# Altium PCB EMG_interface.PcbDoc
Units mil, origin at the board's own origin, x right, y up, seen from the top; angles counter-clockwise.
Board outline 2230 x 1760 mil, 2 copper layers (Top Layer, Bottom Layer); 25 components, 25 nets, 131 pads, 3 vias.
Unrouted connection lines stored in the file: 24.
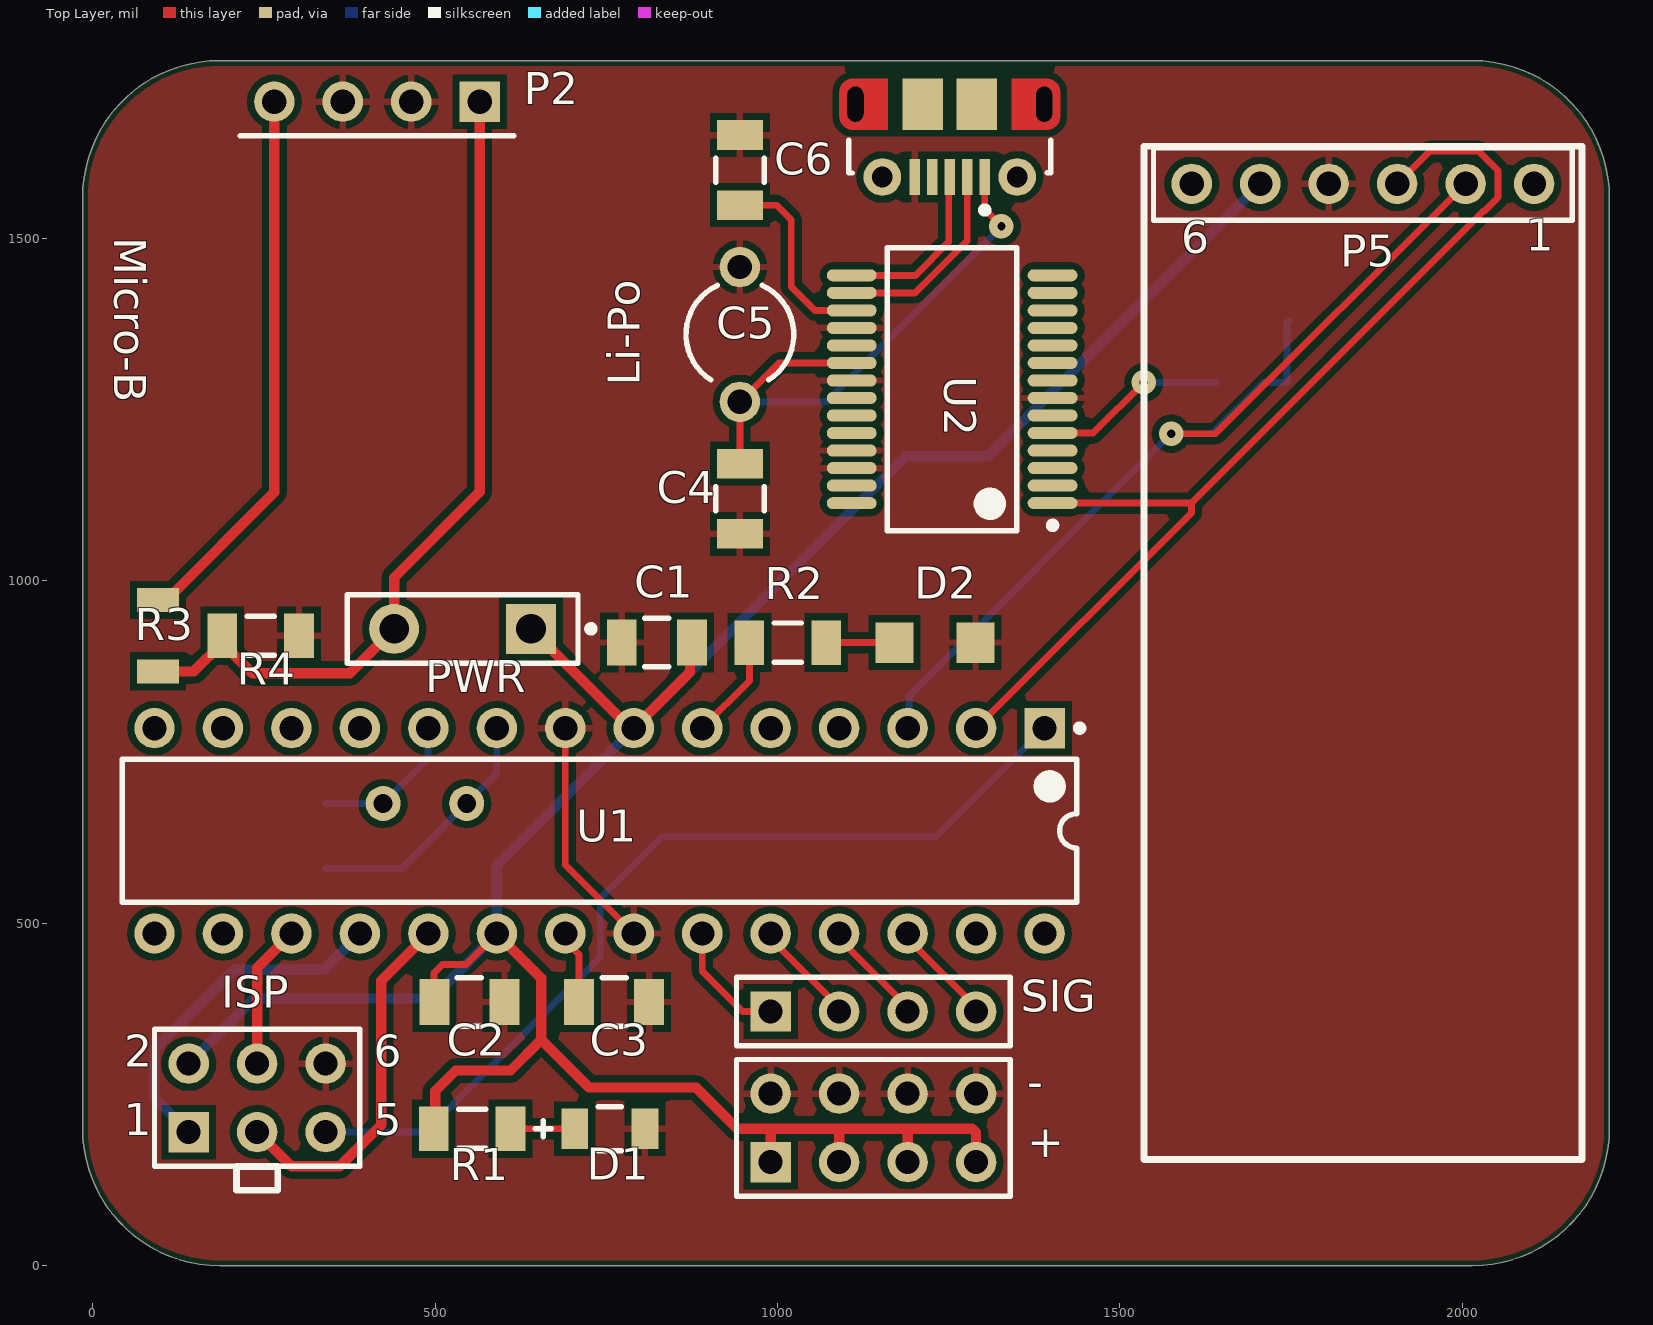
[diagram p0: Top Layer view]
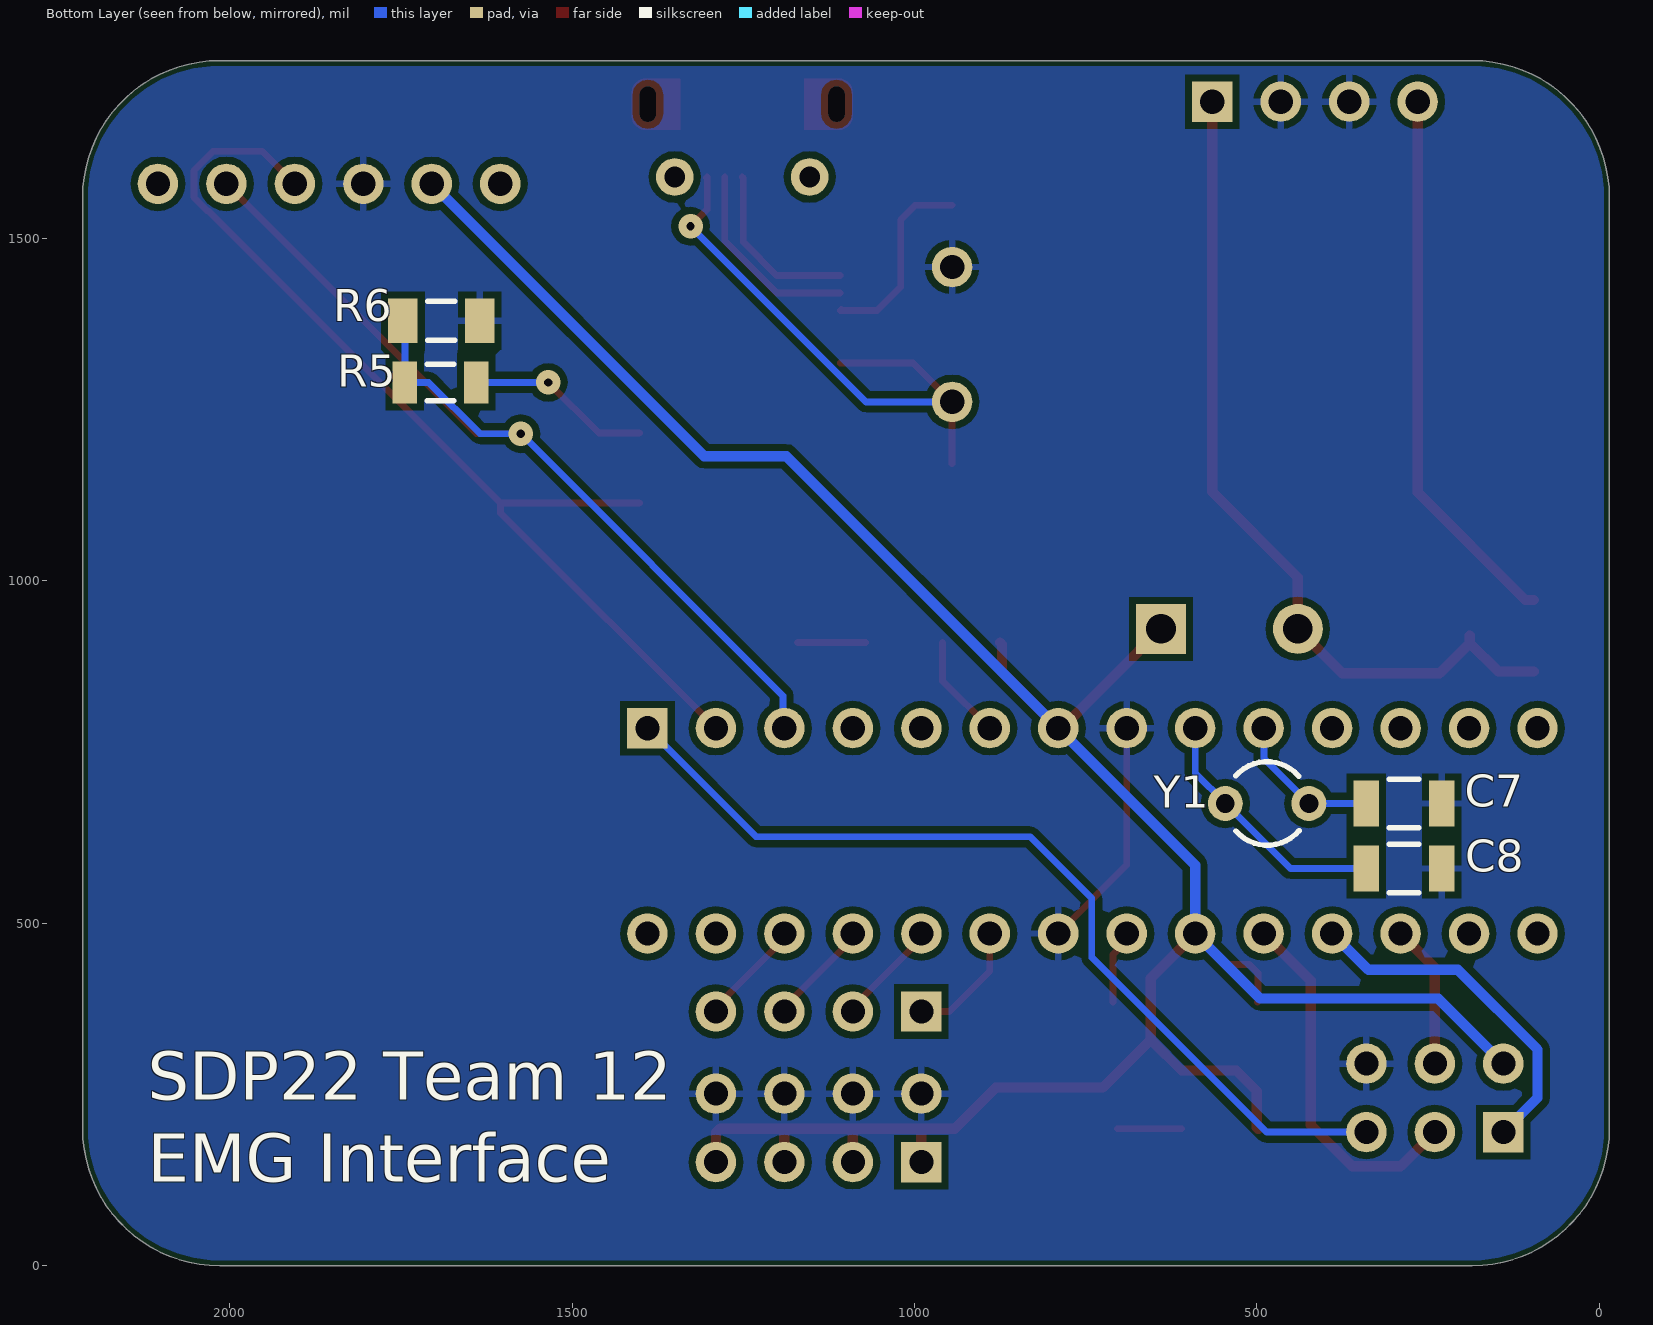
[diagram p1: Bottom Layer view, seen from below]

## Layer stack, top to bottom
Top Solder: solder mask 0.4, Solder Resist, Dk 3.5
Top Layer: signal copper 1.4
Dielectric 1: dielectric 12.6, FR-4, Dk 4.8
Bottom Layer: signal copper 1.4
Bottom Solder: solder mask 0.4, Solder Resist, Dk 3.5

## Board outline
-15,200 -15,1560 cw(c185,1560) 185,1760 2015,1760 cw(c2015,1560) 2215,1560 2215,200 cw(c2015,200) 2015,0 185,0 cw(c185,200)

## Design rules (kind name [scope] priority, off if disabled: settings)
BoardOutlineClearance [All] p1: gap=8 ignorepadtopadclearanceinfootprint=FALSE
Clearance [All] p1: gap=10 ignorepadtopadclearanceinfootprint=FALSE except(0: SMDPad-Hole THPad-Hole Via-Hole Fill-Hole Poly-Hole Region-Hole Text-Hole; 5: Arc-Arc Arc-Track Track-Track SMDPad-SMDPad; 12.99: Arc-THPad Track-THPad; 19.68: THPad-THPad)
HoleSize [All] p1: absolutevalues=TRUE maxlimit=248.03 minlimit=11.81 maxpercent=80.000 minpercent=20.000
HoleToHoleClearance [All] p1: gap=19.68 allowstackedmicrovias=TRUE
MinimumAnnularRing [All] p1: minimumring=11.81
MinimumSolderMaskSliver [All] p1: minsoldermaskwidth=7.87
PolygonConnect [All] p1: thpad.connectstyle=Relief thpad.reliefconductorwidth=10 thpad.reliefentries=4 thpad.polygonreliefangle="90 Angle" thpad.airgapwidth=10 smdpad.connectstyle=Relief smdpad.reliefconductorwidth=10 smdpad.reliefentries=4 smdpad.polygonreliefangle="90 Angle" smdpad.airgapwidth=10 via.connectstyle=Direct via.reliefconductorwidth=10 via.reliefentries=4 via.polygonreliefangle="90 Angle" via.airgapwidth=10
RoutingVias [All] p1: holewidth=12 width=25 viastyle="Through Hole" minholewidth=11.81 minwidth=23.62 maxholewidth=28 maxwidth=50
SilkToSolderMaskClearance [IsPad] p1: minsilkscreentomaskgap=5.91 clearancetoexposedcopper=TRUE
SolderMaskExpansion [All] p1: expansion=2 istentingtop=FALSE
UnRoutedNet [All] p1: checkbadconnections=TRUE
Width [All] p1: maxlimit=20 minlimit=5 preferedwidth=10 minimp=50.000000 maximp=50.000000 favimp=50.000000
25 further rules are at their usual default settings.

## Components (designator, comment, footprint, x,y, rotation, side; value= is the part's Value field where it differs from the comment)
C1 "0.1uF" FP-1206-L_3_2_0_2-W_1_6_0-IPC_C 823.79,910 r180 top
C2 "0.1uF" FP-1206-L_3_2_0_2-W_1_6_0-IPC_C 550,385 r0 top
C3 "0.1uF" FP-1206-L_3_2_0_2-W_1_6_0-IPC_C 761.21,385 r0 top
C4 "0.1uF" FP-1206-L_3_2_0_2-W_1_6_0-IPC_C 945,1120 r270 top
C5 "Cap2" CAPR5-4X5 945,1360 r90 top value=10uF
C6 "0.1uF" FP-1206-L_3_2_0_2-W_1_6_0-IPC_C 945,1600 r90 top
C7 "22pF" FP-C1206C-EB-MFG 285,675 r180 bottom value="22 pF"
C8 "22pF" FP-C1206C-EB-MFG 285,580 r180 bottom value="22 pF"
D1 "PWR" FP-SML-LX1206GC-TR-MFG 755,200 r0 top
ISP "ISP Header" HDR2X3 140,195 r0 top
J1 "105017-0001" USB-MICRO-B_V 1251.57,1643.15 r180 top
P2 "Header 4" HDR1X4#1 565,1700 r180 top
P4 "Header 4X2" HDR2X4 990,151.1 r0 top
P5 "61300611121" 61300611121 1855,1580 r180 top
PWR "Switch" SPST-2 540,930 r180 top
R1 "100" RESC3216X70X50NL05T20 553.9,200 r180 top
R2 "100" RESC3216X70X50NL05T20 1015,910 r0 top
R3 "1k" RESC3216X70X50LL05T20 95,920 r90 top
R4 "2k" RESC3216X70X50NL05T20 245,920 r180 top
R5 "1k" RESC3216X70X50LL05T20 1692.17,1290 r180 bottom
R6 "2k" RESC3216X70X50NL05T20 1691.1,1380 r0 bottom
SIG "Header 4" HDR1X4#2 990,371.1 r0 top
U1 "ATmega328-PU" 28P3 740,635 r270 top
U2 "FT232RL" FTDI-SSOP-28_M 1255,1280 r180 top
Y1 "XTAL" R38 485,675 r90 bottom

## Footprints (in the part's own frame and the unit in brackets; to place one, negate y for a bottom-side part, rotate by r counter-clockwise, add the part's x,y. Pads: shape width x height; smd on the part's side, far side on the other; paste and mask are expansions set on the pad)
28P3 [mm] "28-Pin Plastic Dual In-Line Package (PDIP)"
  rect 1.5x1.5 hole 0.9: 1(-3.81,16.51)
  round 1.5 hole 0.9: 2(-3.81,13.97) 3(-3.81,11.43) 4(-3.81,8.89) 5(-3.81,6.35) 6(-3.81,3.81) 7(-3.81,1.27) 8(-3.81,-1.27) 9(-3.81,-3.81) 10(-3.81,-6.35) 11(-3.81,-8.89) 12(-3.81,-11.43) 13(-3.81,-13.97) 14(-3.81,-16.51) 15(3.81,-16.51) 16(3.81,-13.97) 17(3.81,-11.43) 18(3.81,-8.89) 19(3.81,-6.35) 20(3.81,-3.81) 21(3.81,-1.27) 22(3.81,1.27) 23(3.81,3.81) 24(3.81,6.35) 25(3.81,8.89) 26(3.81,11.43) 27(3.81,13.97) 28(3.81,16.51)
  silkscreen extent -3.93,-17.7 2.65,17.94, body extent -3.6,-17.65 3.6,17.65, height 4.58
61300611121 [mm] "Pin Header, pitch 2.54 mm, THT, Vertical, single row, 6p"
  round 1.5 hole 0.9: 1(-6.35,0) 2(-3.81,0) 3(-1.27,0) 4(1.27,0) 5(3.81,0) 6(6.35,0)
  silkscreen extent -7.77,-1.35 7.77,1.35, body extent -7.62,-1.27 7.62,1.27, height 8.57
CAPR5-4X5 [mm] "Capacitor; 2 Leads"
  round 1.5 hole 0.9: 1(-2.5,0) 2(2.5,0)
  silkscreen extent -1.69,-2 1.82,2
FP-1206-L_3_2_0_2-W_1_6_0-IPC_C [mil]
  rect 43.49x67.17 smd paste+0 mask+0: 1(-51.21,0) 2(51.21,0)
  silkscreen extent -18,-35 18,35, body extent -77,-39 77,39, height 10
FP-C1206C-EB-MFG [mm]
  rect 0.95x1.7 smd paste+0 mask+0: 1(-1.4,0) 2(1.4,0)
  silkscreen extent -0.55,-0.9 0.55,0.9, body extent -1.6,-0.8 1.6,0.8, height 0.88
FP-SML-LX1206GC-TR-MFG [mm]
  rect 1x1.5 smd paste+0 mask+0: 1(-1.3,0) 2(1.3,0)
  silkscreen extent -2.78,-0.81 0.43,0.81, body extent -1.9,-0.91 1.9,0.91, height 0.25
FTDI-SSOP-28_M [mm] "SOP, 28-Leads, Body 10.5x5.6mm, Pitch 0.65mm, IPC Low Density"
  oval 1.85x0.45 smd: 1(-3.725,4.225) 5(-3.725,1.625) 15(3.725,-4.225) 17(3.725,-2.925) 20(3.725,-0.975)
  oval 1.85x0.45 smd mask-0.203: 2(-3.725,3.575) 4(-3.725,2.275) 6(-3.725,0.975) 16(3.725,-3.575) 18(3.725,-2.275) 19(3.725,-1.625) 21(3.725,-0.325)
  oval 1.85x0.45 smd mask+0: 3(-3.725,2.925) 7(-3.725,0.325) 8(-3.725,-0.325) 9(-3.725,-0.975) 10(-3.725,-1.625) 11(-3.725,-2.275) 12(-3.725,-2.925) 13(-3.725,-3.575) 14(-3.725,-4.225) 22(3.725,0.325) 23(3.725,0.975) 24(3.725,1.625) 25(3.725,2.275) 26(3.725,2.925) 27(3.725,3.575) 28(3.725,4.225)
  silkscreen extent -3.85,-5.25 2.4,5.25, body extent -3.9,-5.25 3.9,5.25, height 2
HDR1X4#1 [mm] "Connector; Header; 4 Position"
  rect 1.5x1.5 hole 0.9: 1(0,0)
  round 1.5 hole 0.9: 2(2.54,0) 3(5.08,0) 4(7.62,0)
  silkscreen extent -1.27,1.27 8.89,1.27
HDR1X4#2 [mm] "Connector; Header; 4 Position"
  rect 1.5x1.5 hole 0.889: 1(0,0)
  round 1.5 hole 0.889: 2(2.54,0) 3(5.08,0) 4(7.62,0)
  silkscreen extent -1.27,-1.27 8.89,1.27
HDR2X3 [mm] "Connector; Header; 3x2 Position"
  rect 1.5x1.5 hole 0.889: 1(0,0)
  round 1.5 hole 0.889: 2(0,2.54) 3(2.54,0) 4(2.54,2.54) 5(5.08,0) 6(5.08,2.54)
  silkscreen extent -1.27,-1.27 6.35,3.81
HDR2X4 [mm] "Connector; Header; 4x2 Position"
  rect 1.5x1.5 hole 0.889: 1(0,0)
  round 1.5 hole 0.889: 2(0,2.54) 3(2.54,0) 4(2.54,2.54) 5(5.08,0) 6(5.08,2.54) 7(7.62,0) 8(7.62,2.54)
  silkscreen extent -1.27,-1.27 8.89,3.81
R38 [mm] "Crystal, Thru-Hole; 2 Leads; Body 3.1 x 8.2 mm (Dia.xH)"
  round 1.3 hole 0.7: 1(0,1.55) 2(0,-1.55)
  silkscreen extent -1.55,-1.19 1.55,1.17
RESC3216X70X50LL05T20 [mm] "Chip Resistor, 2-Leads, Body 3.20x1.60mm, IPC High Density"
  rect 0.9x1.55 smd: 1(-1.325,0) 2(1.325,0)
  body extent -1.63,-0.82 1.62,0.82, height 0.7
RESC3216X70X50NL05T20 [mm] "Chip Resistor, 2-Leads, Body 3.20x1.60mm, IPC Medium Density"
  rect 1.1x1.65 smd: 1(-1.425,0) 2(1.425,0)
  silkscreen extent -0.5,-0.72 0.5,0.72, body extent -1.63,-0.82 1.62,0.82, height 0.7
SPST-2 [mm] "Switch; 2 Leads"
  rect 1.85x1.85 hole 1.1: 1(-2.54,0)
  round 1.85 hole 1.1: 2(2.54,0)
  silkscreen extent -4.89,-1.27 4.28,1.27
USB-MICRO-B_V [mm] "USB, MICRO B, Body 7.491x4.695 mm, Pitch 0.65 mm"
  rect 0.381x1.35 smd mask+0: 1(-1.3,1.35) 2(-0.65,1.35) 3(0,1.35) 4(0.65,1.35) 5(1.3,1.35)
  round 1.397 hole 0.762 mask+0.05: 6(-2.5,1.35) 7(2.5,1.35)
  rrect50% 0x0 hole 0.6 slot 1.3 at 90 deg: 8(-3.5,-1.35) 11(3.5,-1.35)
  rect 1.5x1.9 smd: 9(-1,-1.35) 10(1,-1.35)
  Top Layer circle w0.5: c-3.6,-1.8 r0.25
  Top Layer circle w0.5: c-3.6,-0.9 r0.25
  Top Layer circle w0.5: c3.6,-1.8 r0.25
  Top Layer circle w0.5: c3.6,-0.9 r0.25
  Top Layer region: -3.6,-1.8 -3.6,-0.9 -4.1,-0.9 -4.1,-1.8
  Top Layer region: 3.6,-0.9 3.6,-1.8 4.1,-1.8 4.1,-0.9
  Top Layer region: 2.3,-0.4 2.3,-2.3 3.6,-2.3 3.6,-0.4
  Top Layer region: -2.3,-2.3 -2.3,-0.4 -3.6,-0.4 -3.6,-2.3
  silkscreen extent -3.75,-0.01 3.75,2.7

## Part data
C1 C2 C3 C4 C6: library part CMP-04427-013576-1, "General Purpose Ceramic Capacitor, 1206, 100nF, 5%, X7R, 15%, 100V", Capacitance=100nF, Case Code (Imperial)=1206, Case Code (Metric)=3216, Dielectric=X7R, Dielectric Material=Ceramic, Max Operating Temperature=125°C, Min Operating Temperature=-55°C, Package Quantity=1, Tolerance=5%, Voltage=100V, Case/Package=1206, Construction=Flat, Contact Plating=Tin, Depth=1.6mm, Height=1.27mm, Lead Free="Lead Free", Length=3.2mm, Mount="Surface Mount", Number of Pins=2, Packaging="Tape and Reel", Radiation Hardening=No, REACH SVHC="No SVHC", RoHS Compliant=Yes, Series=-, Termination=SMD/SMT, Thickness=0.05inch, Voltage Rating=100V, Voltage Rating (DC)=100V, Width=0.063inch
C5: "Capacitor", PackageDescription="Capacitor; 2 Leads", PackageReference=CAPR5-4X5, Published=23-Sep-2002, Publisher="Altium Limited"
C7 C8: library part CMP-1037-00978-2, "1206 22pF Ceramic Multilayer Capacitor; 50VDC; 125degC; C0G Dielec; +/-5% SMD", Capacitance="22 pF", Manufacturer=KEMET, Manufacturer Part Number=C1206C220J5GACTU, Package=C1206C-EB, Temperature="-55°C to +150°C", Temperature Characteristic=C0G, Temperature Coefficient=15%, Temperature Range High=+150°C, Temperature Range Low=-55°C, Tolerance=0.05, Voltage Rating="50 V", Automotive=Yes, Automotive Grade="Grade 0", Category=Cap, ComponentLink2Description=Datasheet, ComponentLink2URL=https://content.kemet.com/datasheets/KEM_C1007_X8R_ULTRA_150C_SMD.pdf, Device Class L1="Passive Components", Device Class L2=Capacitors, Device Class L3="Ceramic Capacitors", Digikey Description="1206 22pF Ceramic Multilayer Capacitor; 50VDC; 125degC; C0G Dielec; +/-5% SMD", Height=0.88mm, Ipc Land Pattern Name=CAPC320160X78, Lead Free=Yes, Material=Ceramic, Mouser Description="1206 22pF Ceramic Multilayer Capacitor; 50VDC; 125degC; C0G Dielec; +/-5% SMD", Octopart=https://octopart.com/c1206c220j5gactu-kemet-131912, RoHS=TRUE
D1: library part CMP-2000-07122-2, "LED GREEN CLEAR 1206 SMD", Case Code (Imperial)=1206, Case Code (Metric)=3216, Color=Green, Current Rating=25mA, Forward Current=20mA, Forward Voltage=2.2V, Lens Color=Colorless, Max Operating Temperature=85°C, Min Operating Temperature=-40°C, Package Quantity=1, Power Rating=65mW, Approvals=UL, Case/Package=1206, Dominant Wavelength=565nm, Height=1.1mm, Illumination Color=Green, Lead Free="Lead Free", Length=3.2mm, Lens Style=Rectangular, Lens Transparency=Clear, Luminous Intensity=10mcd, Mount="Surface Mount", Number of LEDs=1, Number of Pins=2, Packaging="Tape and Reel", REACH SVHC="No SVHC", RoHS Compliant=Yes, Test Current=20mA, Viewing Angle=160°, Wavelength=565nm, Width=1.6mm
ISP: library part "Header 3X2", "Header, 3-Pin, Dual row", LatestRevisionDate=17-Jul-2002, LatestRevisionNote="Re-released for DXP Platform.", Publisher="Altium Limited"
J1: library part CMP-2000-05827-1, "Micro-USB B Receptacle, Right Angle, Bottom Mount, Surface Mount, with Solder Tabs, -30 to 85 degC, 5-Pin USB, RoHS, Tape and Reel", Manufacturer=Molex, Package Description="5-Leads USB, Micro B, Body 7.5 x 5 mm, Pitch 0.65 mm", Package Reference=MICRO-B, Package Version="Rev. F, 12/2012", Standard Package=1, Voltage - Max=30V, 3D Model=105017-0001.stp, Catalog Drawings=1050170001, Category=Connectors,Interconnects, Circuits=5, Connector Type=USB-microB, Datasheet URL=http://www.molex.com/elqNow/elqRedir.htm?ref=http://www.molex.com/webdocs/datasheets/pdf/en-us/1050170001_IO_CONNECTORS.pdf, Datasheet Version=03/2016, Family=USB,DVI,HDMIConnectors, Featured Product=Micro-USBConnectorsUSBConnectors, Features=Shielded,SolderRetention, Gender=Receptacle, Ingress Protection=-, Manufacturer URL=http://www.molex.com/, Mating Products=WM17145-ND-CABLEMICROUSBBTOSTDA1.0MWM17147-ND-CABLEMICROUSBBTOSTDA2.0MWM17146-ND-CABLEMICROUSBBTOSTDA1.5M, Mounting Technology=SurfaceMount, Mounting Type=BoardCutout,SurfaceMount,RightAngle, Number of Contacts=5, Online Catalog=Molex-MicroUSB, Other Names=WM1399DKR, Package URL=http://www.molex.com/pdm_docs/sd/1050170001_sd.pdf, Packaging=Digi-Reel®, PCN Assembly/Origin=ResinSupplier21/Oct/2015, RoHS Information=1050170001CertofCompliance, Series=-, Specifications=-
P2 SIG: "Header, 4-Pin", LatestRevisionDate=17-Jul-2002, LatestRevisionNote="Re-released for DXP Platform.", Publisher="Altium Limited"
P4: "Header, 4-Pin, Dual row", LatestRevisionDate=17-Jul-2002, LatestRevisionNote="Re-released for DXP Platform.", Publisher="Altium Limited"
P5: library part CMP-1502-01070-1, "THT Vertical Pin Header WR-PHD, Pitch 2.54 mm, Single Row, 6 pins", Contact Resistance=20mOhm, Manufacturer="Wurth Elektronik", Operating Temperature=-40to105degC, Rated Current=3A, Withstanding Voltage=500VAC, Working Voltage=250VAC, Datasheet URL=https://katalog.we-online.de/em/datasheet/6130xx11121.pdf, Gender=Male, Manufacturer URL=http://www.we-online.de, Mounting Technology=THT, Orientation=Vertical, Package Reference=61300611121, Packaging=Bag, Part Number=61300611121, Pin Number=6, Pitch=2.54mm, Publisher=WurthElektronik, Row Number=Single
PWR: library part "Circuit Breaker", "Circuit Breaker", LatestRevisionDate=17-Jul-2002, LatestRevisionNote="Re-released for DXP Platform.", PackageDescription="Switch; 2 Leads", PackageReference=SPST-2, Published=24-Mar-1999, Publisher="Altium Limited"
R1 R2: library part CMP-2003-00016-1, Manufacturer=Panasonic, Part Number=ERJ-8ENF1000V
R3 R5: library part CMP-2003-00017-1, Manufacturer=Panasonic, Part Number=ERJ-8ENF1001V
R4 R6: library part CMP-2003-00195-1, Manufacturer=Panasonic, Part Number=ERJ-8ENF2001V
U1: library part CMP-0095-00015-2, "8-bit AVR Microcontroller, 32KB Flash, 1KB EEPROM, 2KB SRAM, 28-pin PDIP, Industrial Grade (-40°C to 85°C)", ComponentLink1Description="Manufacturer URL", ComponentLink1URL=http://www.atmel.com/, ComponentLink2Description="ATmega48A/48PA/88A/88PA/168A/168PA/328/328P Datasheet", ComponentLink2URL=http://www.atmel.com/dyn/resources/prod_documents/8271.pdf, ComponentLink3Description="ATmega48A/48PA/88A/88PA/168A/168PA/328/328P Summary", ComponentLink3URL=http://www.atmel.com/dyn/resources/prod_documents/8271S.pdf, DatasheetVersion="revD, May-2011", PackageDescription="28-lead (0.300\"/7.62mm Wide) Plastic Dual Inline Package (PDIP)", PackageReference=28P3, PackageVersion="revB, Sep-2001", RevisionNote="DatasheetVersion updated. URLs added."
U2: library part CMP-2000-05029-1, "IC USB FS SERIAL UART 28-SSOP", Manufacturer=FTDI, Maximum Operating Temperature=+85degC, Minimum Operating Temperature=-40degC, Package Type=SSOP, Datasheet URL=http://datasheet.octopart.com/FT232RL-FTDI-datasheet-120501.pdf, Datasheet Version="Rev. 1.04, 02/2006", Dimensions=10.2x5.3x1.75mm, Height=1.75mm, Length=10.2mm, Manufacturer URL=http://www.ftdichip.com/, Maximum Data Rate=3MBd, Mounting Type=SurfaceMount, Number of Channels per Chip=1, Pin Count=28, Receive FIFO=256B, Transmit FIFO=128B, Width=5.3mm
Y1: "Crystal Oscillator", LatestRevisionDate=17-Jul-2002, LatestRevisionNote="Re-released for DXP Platform.", PackageDescription="Crystal, Thru-Hole; 2 Leads; Body 3.1 x 8.2 mm (Dia.xH)", PackageReference=R38, Published=8-Jun-2000, Publisher="Altium Limited"

## Free pads (board coordinates)
  rect 55.12x59.06 smd: 1(1289.06,910) 2(1170.94,910)

## Via types
v1: diameter 36, hole 12, Top Layer to Bottom Layer, 3 vias

## Nets (pads, with @x,y where several pads share a name; then routed paths per layer and width w, separated by ;. In a path a pad name is that pad's centre, name@x,y a point inside that pad or via, vN(x,y) a via of type N, cw(c..) or ccw(c..) an arc to the next point about the centre after c; other vN are vias at no path point)
A0: SIG.1 U1.23 | length 179.4
  Top Layer w10: U1.23 890,430 948.9,371.1 SIG.1
A1: SIG.2 U1.24 | length 155.3
  Top Layer w10: U1.24 990,478.05 1090,378.05 SIG.2
A2: SIG.3 U1.25 | length 155.3
  Top Layer w10: U1.25 1090,478.05 1190,378.05 SIG.3
A3: SIG.4 U1.26 | length 155.3
  Top Layer w10: U1.26 1190,478.05 1290,378.05 SIG.4
GND: C1.2 C2.2 C3.2 C4.2 C5.2 C6.2 C7.2 C8.2 D1.2 ISP.6 J1.5 P2.2 P2.3 P4.2 P4.4 P4.6 P4.8 P5.4 pad.1 R4.1 R6.1 U1.8 U1.22 U2.7 U2.18 U2.21 U2.25 U2.26 | length 341.4
  Top Layer w10: U1.8 690,585 U1.22
MISO: ISP.1 U1.18 | length 511.6
  Bottom Layer w15: ISP.1 89.98,245.02 89.98,315.72 206.26,432 337,432 U1.18
MOSI: ISP.4 U1.17 | length 210.7
  Top Layer w15: ISP.4 240,435 U1.17
NetC3_1: C3.1 U1.21 | length 108.3
  Top Layer w10: U1.21 690,474.61 710,454.61 C3.1
NetC4_1: C4.1 C5.1 J1.1 U2.20 | length 849.1
  Top Layer w10: C4.1 C5.1 1001.81,1318.39 U2.20 ; J1.1@1303.88,1588.88 J1.1 1302.76,1542.24 v1(1327,1518)
  Bottom Layer w10: C5.1 1070.57,1261.57 v1(1327,1518)
NetC6_1: C6.1 U2.17 | length 286.2
  Top Layer w10: C6.1 998.79,1548.79 1020,1527.58 1020,1430 1054.84,1395.16 U2.17 U2.17@1106.87,1396.63
NetD1_1: D1.1 R1.1 | length 93.8
  Top Layer w10: R1.1 D1.1
NetD2_2: pad.2 R2.2 | length 99.8
  Top Layer w10: R2.2 pad.2
NetJ1_2: J1.2 U2.16 | length 293.3
  Top Layer w10: U2.16 1200.75,1420.75 1277.17,1497.17 J1.2
NetJ1_3: J1.3 U2.15 | length 257.5
  Top Layer w10: U2.15 1201.34,1446.34 1250,1495 1250,1588.43 J1.3
NetP2_1: P2.1 PWR.2 R3.1 R4.2 | length 1239.9
  Top Layer w15: R3.1 147.56,867.83 R4.2@188.9,909.17 ; R4.2 R4.2@188.9,909.17 ; P2.1 565,1130 440,1005 PWR.2 375,865 233.07,865 R4.2@188.9,909.17
NetP2_4: P2.4 R3.2 | length 805.7
  Top Layer w15: R3.2 107.8,972.17 265,1129.37 P2.4
NetR2_1: R2.1 U1.6 | length 163.5
  Top Layer w10: U1.6@900,785 U1.6 958.9,853.9 R2.1
NetR5_2: R5.2 U2.5 | length 269
  Top Layer w10: U2.5 1461.02,1216.02 v1(1535,1290)
  Bottom Layer w10: v1(1535,1290) R5.2
RST: ISP.5 U1.1 | length 1344.8
  Bottom Layer w10: ISP.5 486,195 741,450 741,536 831.49,626.49 1231.49,626.49 U1.1
RXD: P5.3 U1.2 U2.1 | length 1512.9
  Top Layer w10: U1.2 1604.42,1099.42 1604.42,1113.66 ; U2.1 1604.42,1113.66 ; P5.3 1952.52,1627.52 2024.68,1627.52 2052.52,1599.68 2052.52,1560.32 2032.39,1540.19 2030.94,1540.19 1604.42,1113.66
SCK: ISP.3 U1.19 | length 535
  Top Layer w15: ISP.3 290.02,144.98 360.72,144.98 421.14,205.41 421.14,416.14 U1.19
TXD: P5.2 R5.1 R6.2 U1.3 | length 1473.7
  Top Layer w10: v1@1573.98,1216.02 v1(1575,1215) 1640,1215 P5.2
  Bottom Layer w10: U1.3@1200,785 U1.3 1192.23,787.23 1192.23,832.23 v1(1575,1215) 1634.44,1215 1709.44,1290 R5.1 1744.33,1377.13 R6.2
VCC: C1.1 C2.1 ISP.2 P4.1 P4.3 P4.5 P4.7 P5.5 PWR.1 R1.2 U1.7 U1.20 | length 3994.1
  Top Layer w10: C2.1 498.41,385.38 498.41,427.73 510.68,440 545,440 U1.20
  Top Layer w15: R1.2 500,202.2 500,255 530,285 610,285 655,330 ; U1.20 655,420 655,330 ; PWR.1 706.01,863.99 785,785 U1.7 872.27,867.27 872.27,907.27 C1.1 ; P4.1 990,200 ; P4.3 1090,194.14 1084.14,200 ; P4.5 1190,194.14 1184.14,200 ; P4.7 1290,194.14 1284.14,200 1184.14,200 ; 655,330 725,260 881.1,260 941.1,200 990,200 ; 990,200 1084.14,200 ; 1084.14,200 1184.14,200
  Bottom Layer w15: ISP.2 235,390 495,390 U1.20 590,585 U1.7 1187.12,1182.12 1307.12,1182.12 P5.5
XTAL1: C8.1 U1.9 Y1.1 | length 373.1
  Bottom Layer w10: C8.1 451.02,580 Y1.1 ; Y1.1@546.02,675.32 590,719.3 U1.9
XTAL2: C7.1 U1.10 Y1.2 | length 221.2
  Bottom Layer w10: C7.1 Y1.2 489.45,740.47 489.45,784.45 U1.10
pads on no net: J1.4 J1.6 J1.7 J1.8 J1.9 J1.10 J1.11 P5.1 P5.6 U1.4 U1.5 U1.11 U1.12 U1.13 U1.14 U1.15 U1.16 U1.27 U1.28 U2.2 U2.3 U2.4 U2.6 U2.8 U2.9 U2.10 U2.11 U2.12 U2.13 U2.14 U2.19 U2.22 U2.23 U2.24 U2.27 U2.28

## Polygon pours and split planes (outlines as drawn)
GND on Bottom Layer "Bot GND" (solid, pour order 1): -15,200 -15,1560 cw(c185,1560) 185,1760 2015,1760 cw(c2015,1560) 2215,1560 2215,200 cw(c2015,200) 2015,0 185,0 cw(c185,200)
GND on Top Layer "Top GND" (solid, pour order 0): -15,200 -15,1560 cw(c185,1560) 185,1760 2015,1760 cw(c2015,1560) 2215,1560 2215,200 cw(c2015,200) 2015,0 185,0 cw(c185,200)

## Silkscreen, mask and mechanical layers (free items; w line width, h text height)
Top Overlay:
  lines w10: 210,110 270,110 270,145 210,145 210,110 ; 1535,155 2175,155 2175,1635 1535,1635 1535,155
  text "Micro-B" at 15.74,1502 h80 r270
  text "Li-Po" at 814.26,1285 h80 r90
  text "D2" at 1200,959 h80
  text "SIG" at 1355,355.74 h80
  text "-" at 1365,230.5 h80
  text "+" at 1365,143.15 h80
Bottom Overlay:
  text "SDP22 Team 12 / EMG Interface" at 2120,99 h120
Mechanical 1:
  the board outline again, w10
Mechanical 13:
  lines w3.94: 1167.01,876.54 1167.01,943.46 1292.99,943.46 1292.99,876.54 1167.01,876.54
Mechanical 15:
  lines w3.94: 1210.31,910 1249.68,910 ; 1230,890.31 1230,929.68 ; 1139.45,870.63 1139.45,949.37 1320.55,949.37 1320.55,870.63 1139.45,870.63

## Text inside footprints (layer, text, board x,y; h text height)
ISP: Top Overlay "1" at 45,175 h80; Top Overlay "2" at 46,275 h80; Top Overlay "5" at 410,175 h80; Top Overlay "6" at 410,275 h80
J1: Mechanical 1 "PCB EDGE" at 1535.04,1757.32 h80 r180
P5: Top Overlay "6" at 1590,1463 h80; Top Overlay "1" at 2093,1467 h80